# Altium PCB BMS_LOST_V1.PcbDoc
Units mil, origin at the board's own origin, x right, y up, seen from the top; angles counter-clockwise.
Board outline 1732.28 x 1703.8 mil, 2 copper layers (Top Layer, Bottom Layer); 24 components, 32 nets, 128 pads, 24 vias.
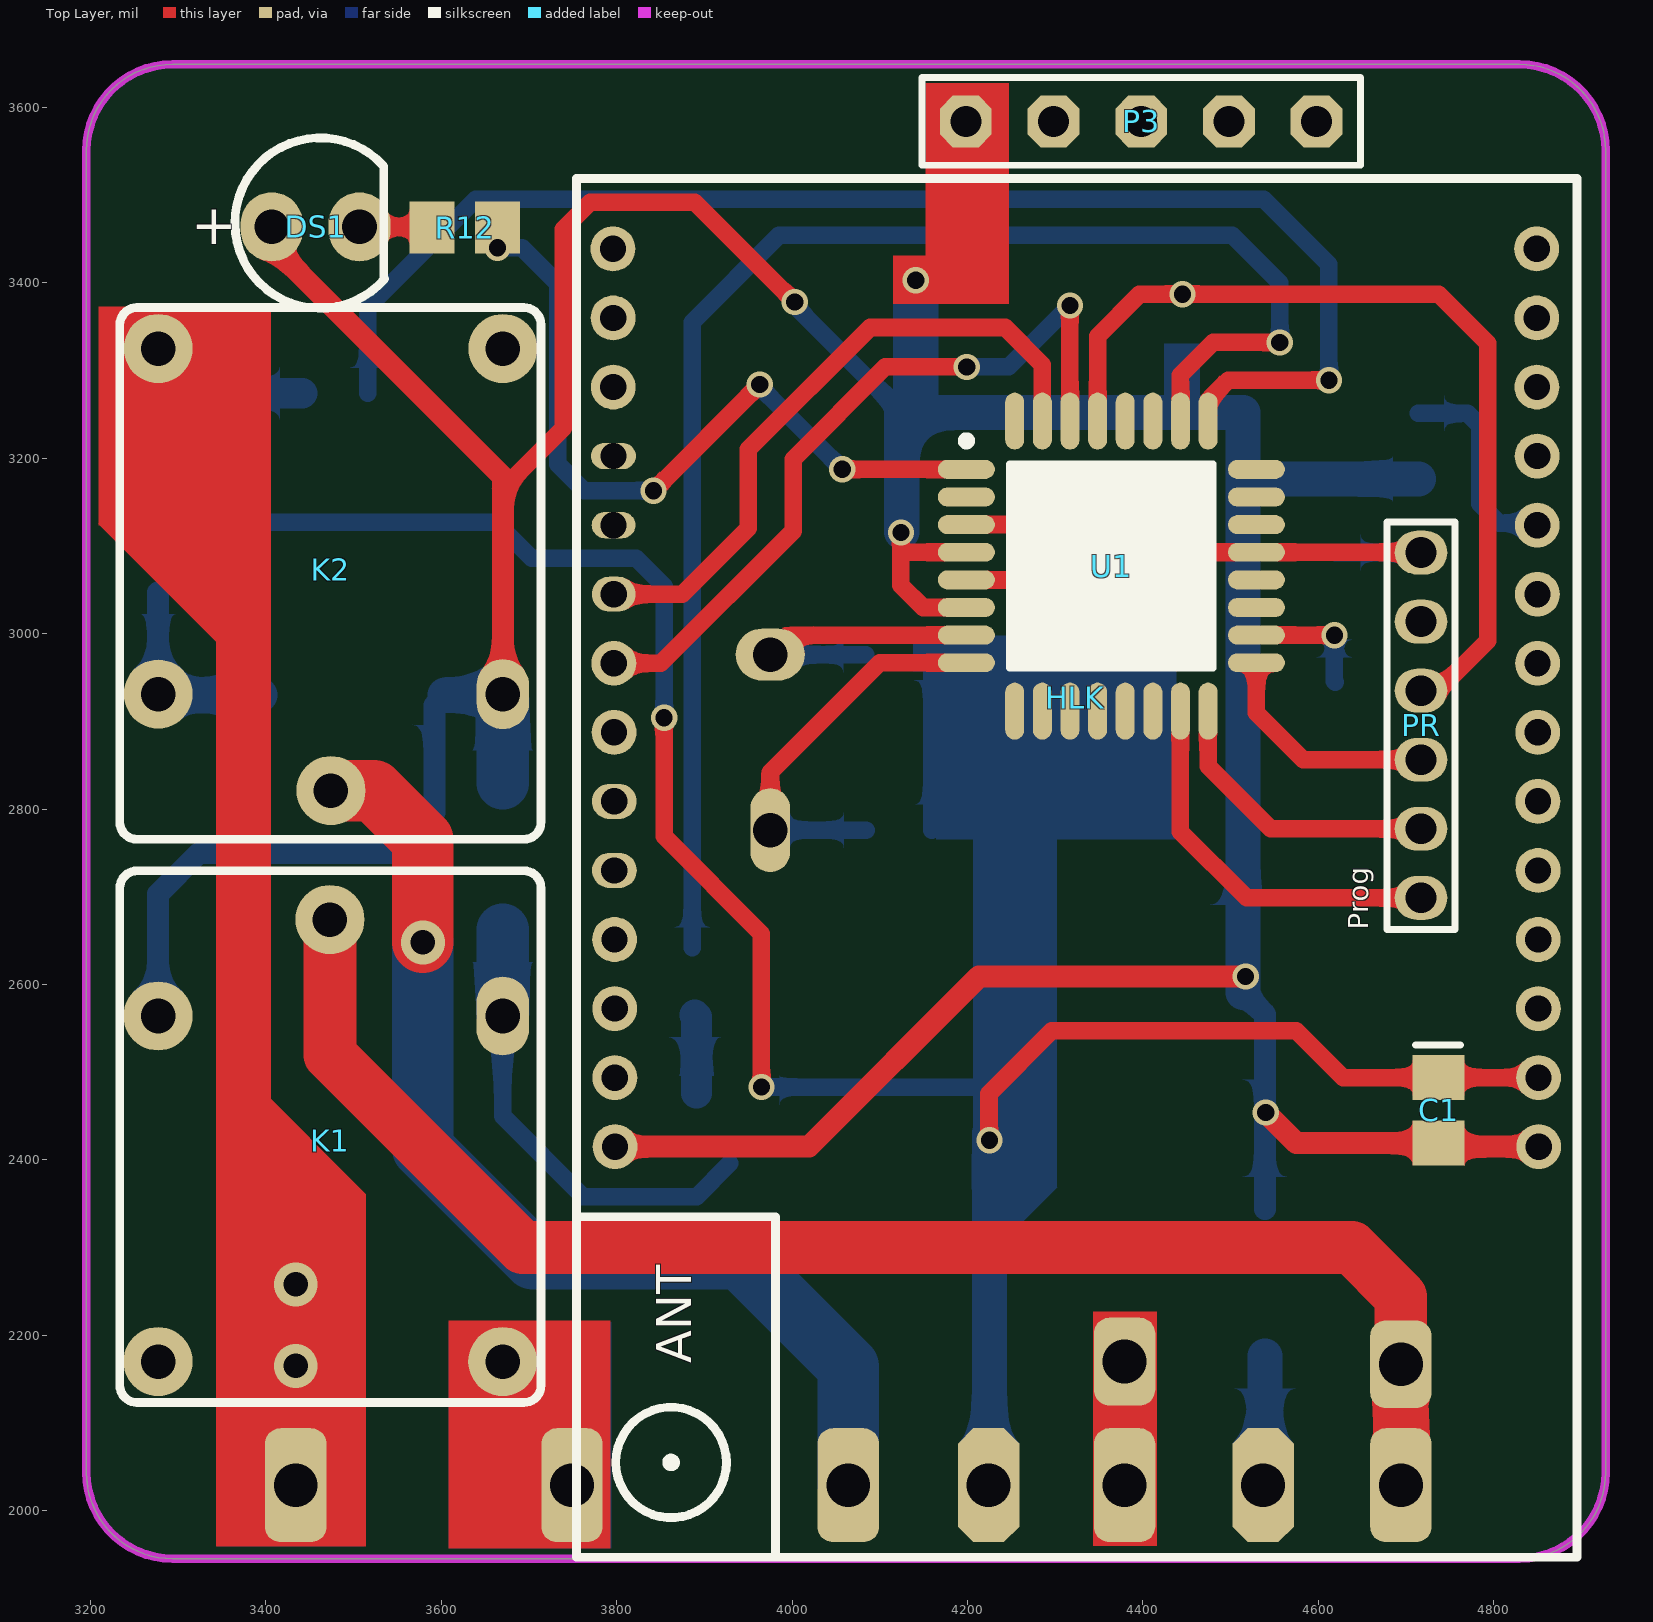
[diagram p0: Top Layer view]
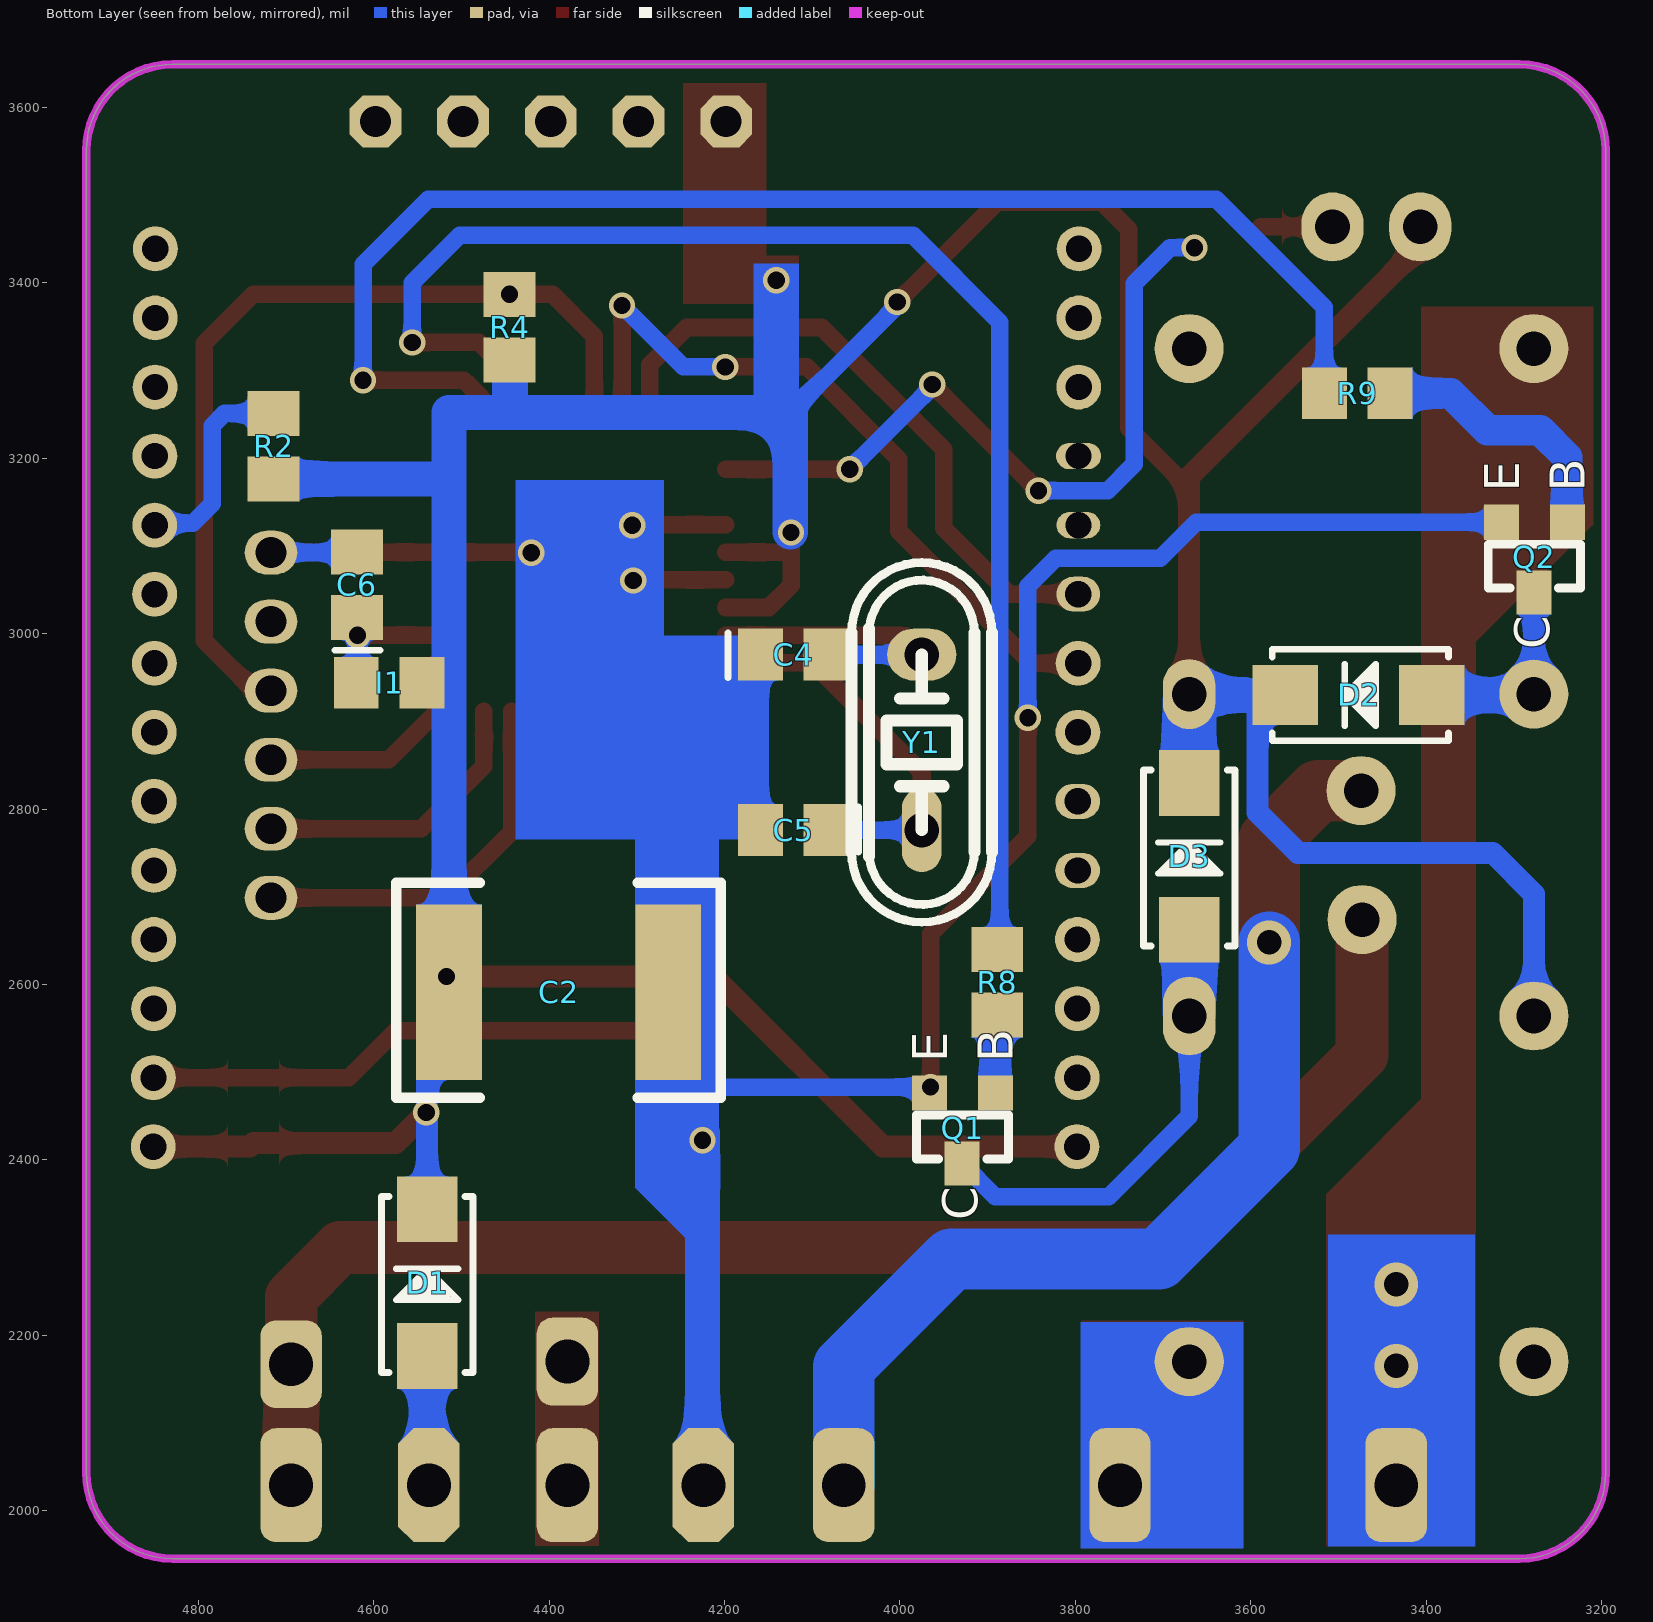
[diagram p1: Bottom Layer view, seen from below]
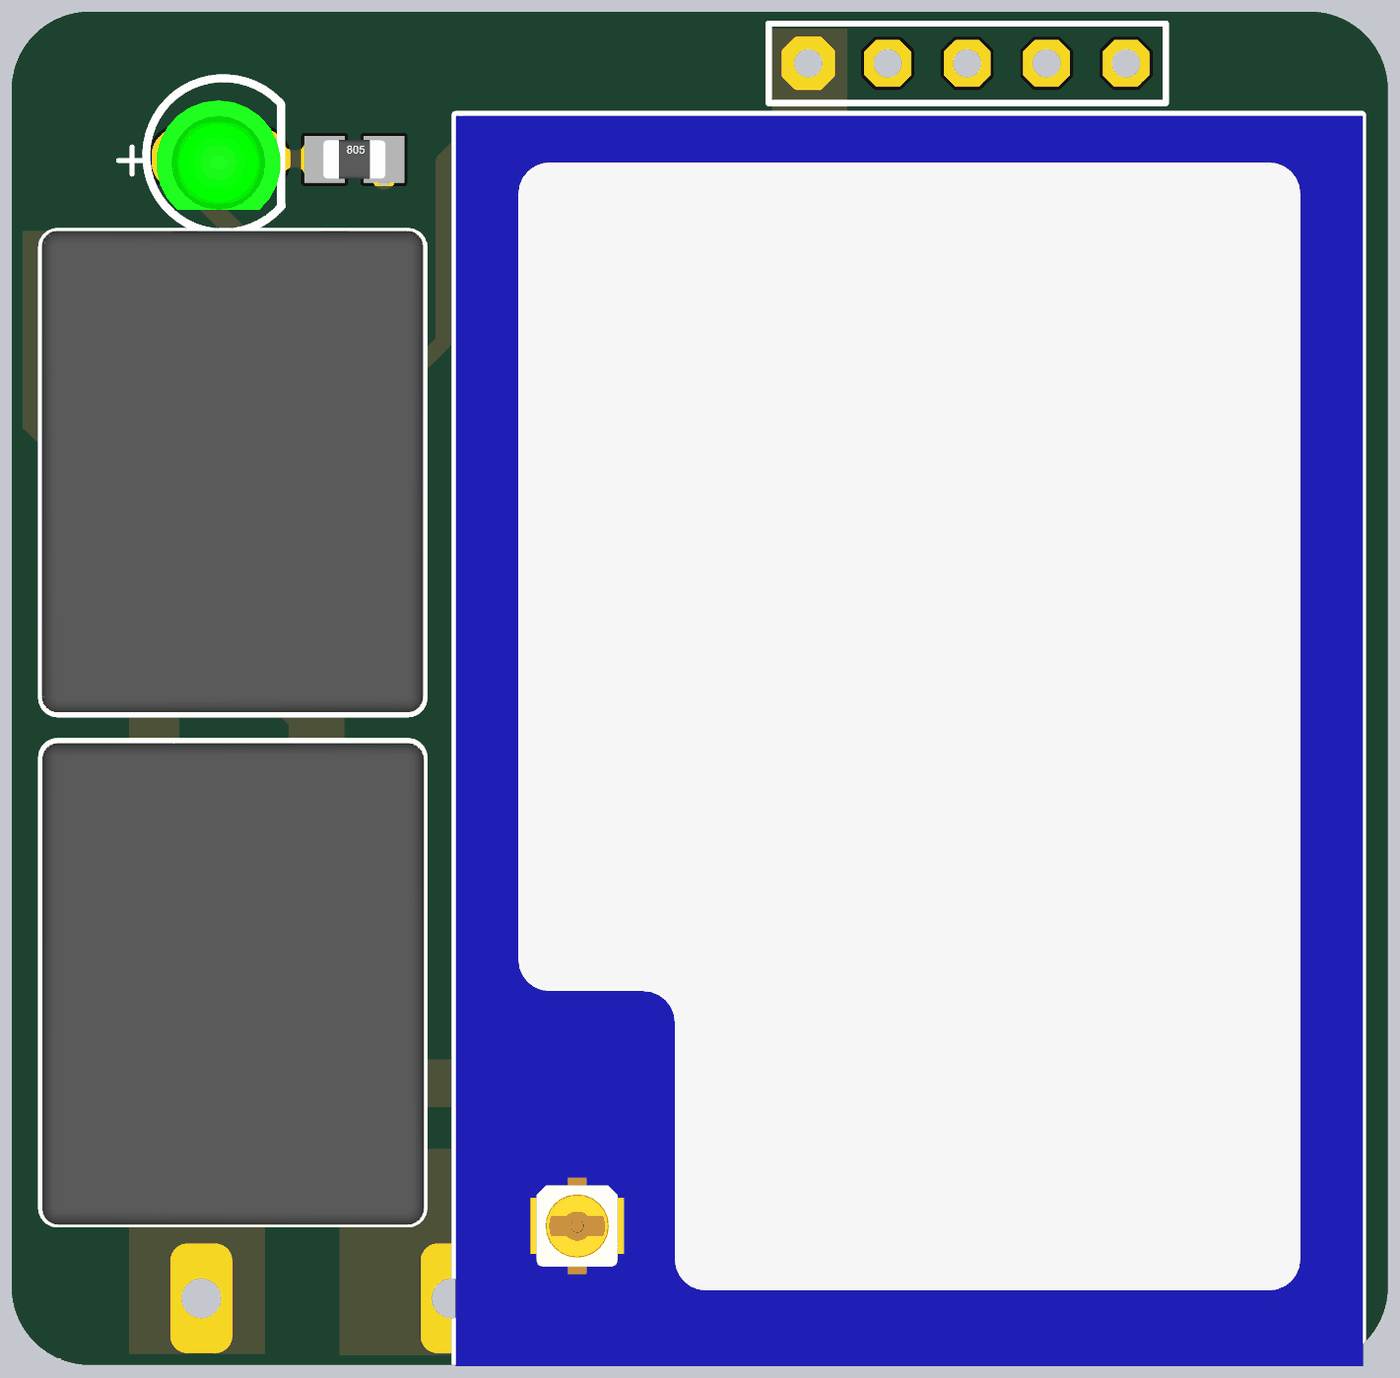
[diagram p2: 3D render of the assembled board from above, using the file's embedded part models]
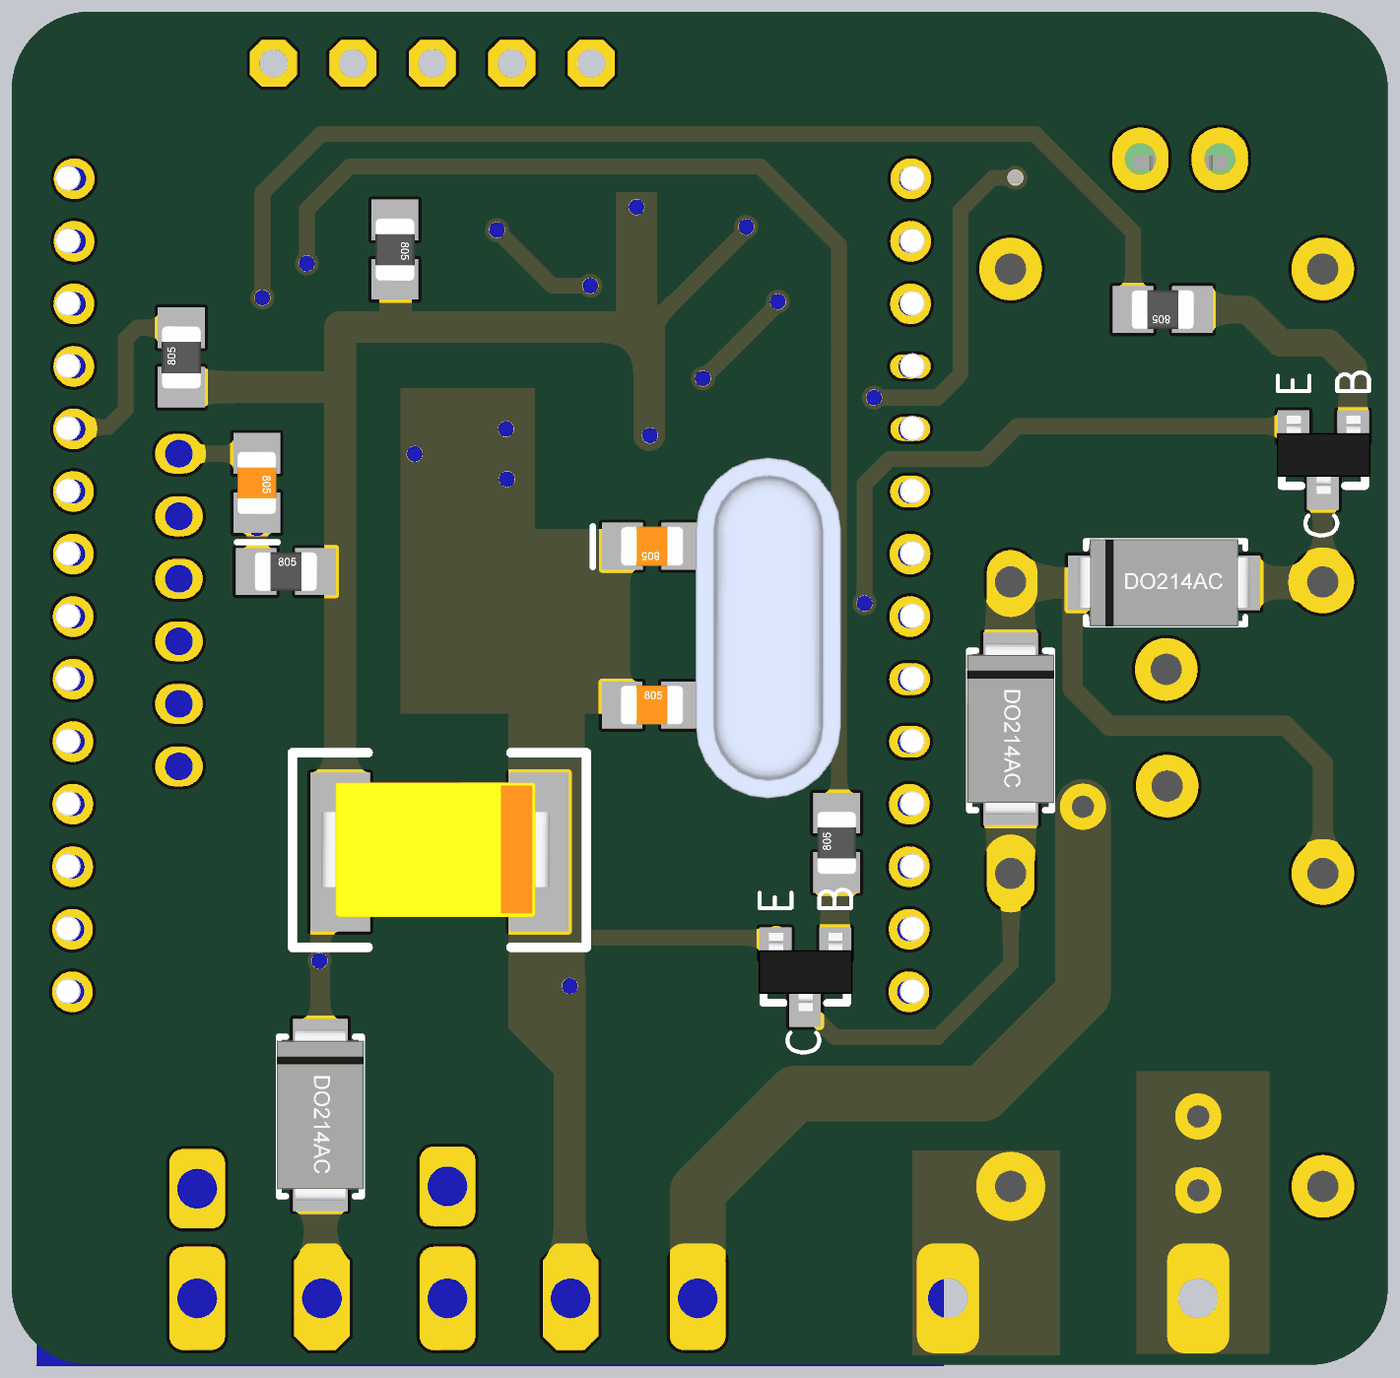
[diagram p3: 3D render of the assembled board from below, using the file's embedded part models]

## Layer stack, top to bottom
Top Solder: solder mask 0.4, Solder Resist, Dk 3.5
Top Layer: signal copper 1.4
Dielectric 1: dielectric 12.6, FR-4, Dk 4.8
Bottom Layer: signal copper 1.4
Bottom Solder: solder mask 0.4, Solder Resist, Dk 3.5

## Board outline
3195.25,2043.68 3195.25,3550.63 cw(c3293.68,3550.63) 3293.68,3649.05 4829.11,3649.05 cw(c4829.11,3550.63) 4927.53,3550.63 4927.53,2043.68 cw(c4829.11,2043.68) 4829.11,1945.25 3293.68,1945.25 cw(c3293.68,2043.68)

## Design rules (kind name [scope] priority, off if disabled: settings)
Clearance [All] p1: gap=10
PolygonConnect [All] p1: connectstyle=Relief reliefconductorwidth=10 reliefentries=4 polygonreliefangle="90 Angle" airgapwidth=10
RoutingVias [All] p1: holewidth=28 width=50 viastyle="Through Hole" minholewidth=28 minwidth=50 maxholewidth=28 maxwidth=50
SolderMaskExpansion [All] p1: expansion=4
Width [All] p1: maxlimit=100 minlimit=10 preferedwidth=10
30 further rules are at their usual default settings.

## Components (designator, comment, footprint, x,y, rotation, side; value= is the part's Value field where it differs from the comment)
C1 "100nf" Cap0805 4737,2419 r90 top
C2 "Cap_4mm" 2220 4268,2589 r0 bottom
C4 "CAP 805" Cap0805 4084,2976 r0 bottom
C5 "CAP 805" Cap0805 4159,2776 r180 bottom
C6 "Cap0805" Cap0805 4619,3093 r270 bottom
D1 "SS34" Diod-1A-SMD 4538,2174 r90 bottom
D2 "SS34" Diod-1A-SMD 3391,2931 r0 bottom
D3 "SS34" Diod-1A-SMD 3669,2660 r90 bottom
DS1 "LED1" LED3MM 3512,3466 r180 top
HLK "HLK_WifiModule" HLK 4850,3440 r180 top
I1 "Indicator100uH" Indicator0805 4618,2942 r180 bottom
K1 "Relay" RelayMilionMiniS-Z#1 3670,2170 r90 top
K2 "Relay" RelayMilionMiniS-Z#2 3277.18,3325 r270 top
P3 "Header 5" HDR1X5 4198,3584 r0 top (schematic designator P2)
PR "Programmer" Programmer 4716,2701.43 r90 top
Q1 "BC817" SOT23 3889,2477 r0 bottom
Q2 "BC817" SOT23 3237,3128 r0 bottom
R2 "Res 0805" R0805 4714,3178 r90 bottom
R4 "Res 0805" R0805 4445,3385 r270 bottom
R8 "Res 0805" R0805 3889,2567 r90 bottom
R9 "Res 0805" R0805 3443,3274 r0 bottom
R12 "330" R0805 3591,3463 r0 top
U1 "ATmega8-16AU" 32A_N 4364,3077 r0 top
Y1 "Xtal" CrystallB 3976,2977 r270 bottom

## Footprints (in the part's own frame and the unit in brackets; to place one, negate y for a bottom-side part, rotate by r counter-clockwise, add the part's x,y. Pads: shape width x height; smd on the part's side, far side on the other; paste and mask are expansions set on the pad)
32A_N [mm] "Thin QFP, 32-Leads, Body 7x7mm, Pitch 0.8mm, IPC Medium Density"
  oval 1.65x0.55 smd: 1(-4.2,2.8) 2(-4.2,2) 3(-4.2,1.2) 4(-4.2,0.4) 5(-4.2,-0.4) 6(-4.2,-1.2) 7(-4.2,-2) 8(-4.2,-2.8) 17(4.2,-2.8) 18(4.2,-2) 19(4.2,-1.2) 20(4.2,-0.4) 21(4.2,0.4) 22(4.2,1.2) 23(4.2,2) 24(4.2,2.8)
  oval 0.55x1.65 smd: 9(-2.8,-4.2) 10(-2,-4.2) 11(-1.2,-4.2) 12(-0.4,-4.2) 13(0.4,-4.2) 14(1.2,-4.2) 15(2,-4.2) 16(2.8,-4.2) 25(2.8,4.2) 26(2,4.2) 27(1.2,4.2) 28(0.4,4.2) 29(-0.4,4.2) 30(-1.2,4.2) 31(-2,4.2) 32(-2.8,4.2)
  silkscreen extent -4.32,-2.95 2.95,3.75, body extent -3.5,-3.5 3.5,3.5, height 1.2
2220 [mil]
  rect 75x200 smd: 1(-4,-2) 2(246,-2)
  silkscreen extent -64,-127 306,118, body extent -18,-90 270,80, height 122
Cap0805 [mm]
  rect 1.3x1.5 smd: 1(0,0) 2(1.9,0)
  silkscreen extent 2.84,-0.63 2.84,0.67, body extent -0.05,-0.62 1.95,0.63, height 0.78
CrystallB [mil]
  oval 95.55x45 hole 39.37: 1(201,1)
  oval 59.06x78.74 hole 39.37: 2(1,1)
  silkscreen extent -104,-79 306,81, body extent -111,-91 319,93, height 138
Diod-1A-SMD [mm]
  rect 1.9x1.75 smd: A(0.059,0.025) K(4.309,0.025)
  silkscreen extent -0.42,-1.3 4.68,1.35, body extent -0.56,-1.37 4.93,1.42, height 2.24
HDR1X5 [mm] "Connector; Header; 5 Position"
  oct 1.5x1.5 hole 0.9: 1(7.62,0) 2(10.16,0) 3(5.08,0) GND(2.54,0) VCC(0,0)
  silkscreen extent -1.27,-1.27 11.43,1.27
HLK [mm]
  round 1.3 hole 0.762: 1(-0.03,26.035) 2(-0.025,24.035) 3(-0.021,22.035) 4(-0.016,20.035) 5(-0.012,18.035) 6(-0.007,16.035) 7(-0.002,14.035) 8(0.002,12.035) 9(0.007,10.035) 10(0.011,8.035) 11(0.016,6.035) 12(0.021,4.035) 13(0.025,2.035) 14(0.03,0.035) 15(26.78,0.035) 16(26.775,2.035) 17(26.771,4.035) 21(26.752,12.035) 22(26.748,14.035) 25(26.734,20.035) 26(26.729,22.035) 27(26.725,24.035) 28(26.72,26.035)
  oval 1.3x0.762 hole 0.762: 18(26.766,6.035)
  oval 1.27x0.762 hole 0.762: 19(26.761,8.035)
  oval 1.27x1.016 hole 0.762: 20(26.757,10.035)
  oval 1.3x1.016 hole 0.762: 23(26.743,16.035) 24(26.738,18.035)
  silkscreen extent -1.14,-2.01 27.84,37.92, body extent -1.17,-1.99 27.83,38.01, height 5.25
Indicator0805 [mm]
  rect 1.3x1.5 smd: 1(-0.046,0.051) 2(1.854,0.051)
  body extent -0.1,-0.57 1.9,0.68, height 0.78
LED3MM [mm]
  oval 1.8x2 hole 1: A(2.675,0.059) K(0.135,0.059)
  silkscreen extent -0.6,-2.52 3.74,2.42, body extent -0.56,-1.81 3.43,1.68, height 7.88
Programmer [mil]
  oval 50x60 hole 35: 1(-2.7,-1) 2(76.04,-1) 3(154.78,-1) 4(233.52,-1) 5(312.26,-1) 6(391,-1)
  silkscreen extent -39,-40 426,38
R0805 [mm]
  rect 1.3x1.5 smd: 1(-0.046,0) 2(1.854,0)
  body extent -0.1,-0.62 1.9,0.63, height 0.78
RelayMilionMiniS-Z#1 [mm]
  round 2 hole 1: 1(10.008,9.982) 2(0,9.982) 3(0,0) 5(12.802,5.004)
  oval 2.286x1.524 hole 1: 4(10.008,0)
  silkscreen extent -1.19,-1.11 14.21,11.09, body extent -1.22,-1.12 14.18,11.08, height 13
RelayMilionMiniS-Z#2 [mm]
  oval 2.032x1.524 hole 1: 1(10.008,9.982)
  round 2 hole 1: 2(0,9.982) 3(0,0) 4(10.008,0) 5(12.802,5.004)
  silkscreen extent -1.19,-1.11 14.21,11.09, body extent -1.22,-1.12 14.18,11.08, height 13
SOT23 [mil]
  rect 40x40 smd: 1(2,1) 2(77,1)
  rect 40x50 smd: 3(40,81)
  silkscreen extent -13,26 92,76, body extent -20,-12 98,86, height 41

## Part data
C1 C4 C5: library part Cap0805, "surface mount capacitor (size 805)"
C2: library part Cap_Pola
C6: "surface mount capacitor (size 805)"
D1 D2 D3: library part Diode
K1 K2: library part RelayMilon
P3: "Header, 5-Pin"
Q1 Q2: library part "Transistor NPN"
R12: library part "Res 0805"
U1: "8-bit AVR Microcontroller, 4.5-5.5V, 16MHz, 8KB Flash, 512 Bytes EEPROM, 1KB SRAM, 32-pin TQFP, Industrial Grade (-40°C to 85°C)"
Y1: library part Crystal

## Free pads (board coordinates)
  rrect50% 70x130 hole 50: 0(3434,2029) 0(3749,2029) 0(4064,2029) 0(4379,2029) 0(4694,2029)
  oct 70x130 hole 50: 0(4224,2029) 0(4537,2029)
  rrect50% 70x100 hole 50: 0(4379,2170) 0(4694,2167)

## Via types
v1: diameter 30, hole 19.68, Top Layer to Bottom Layer, tented both sides, 21 vias
v2: diameter 50, hole 28, Top Layer to Bottom Layer, 3 vias

## Nets (pads, with @x,y where several pads share a name; then routed paths per layer and width w, separated by ;. In a path a pad name is that pad's centre, name@x,y a point inside that pad or via, vN(x,y) a via of type N, cw(c..) or ccw(c..) an arc to the next point about the centre after c; other vN are vias at no path point)
AVCC: C6.2 I1.1 U1.18 | length 142.7
  Top Layer w20: U1.18 v1(4618.26,2998.26)
  Bottom Layer w20: v1(4618.26,2998.26) 4618.26,2945.54 I1.1@4619,2944.8
B_RST: 
B_RX: 
B_TX: 
GND: C1.2 C2.1 C4.2 C5.1 C6.1 HLK.2 pad.0@4224,2029 PR.6 Q1.2 Q2.2 U1.3 U1.5 U1.21 | length 3544.3
  Top Layer w20: v1(3854,2904) 3854,2769 3965,2658 v1(3965,2483) ; U1.5 v1@4304,3061.25 ; U1.3 v1@4305.24,3124.24 ; v1@4224.45,2422.34 4224.45,2475.45 4296,2547 4575,2547 4628.2,2493.8 C1.2 4850.94,2493.8 HLK.2 ; v1@4421.25,3092.75 U1.21 4716.68,3092.75 PR.6
  Top Layer w25: pad.0@4224,2029 pad.0@4224.45,2029.45
  Bottom Layer w20: Q2.2 3662,3127 3703,3086 3822,3086 3854,3054 v1(3854,2904) ; v1(3965,2483) 4242.2,2483 4243.2,2484 ; C4.2 4159,2975.8 C5.1 ; pad.0@4224,2029 pad.0@4225,2030 ; C6.1@4619.57,3092.43 PR.6
  Bottom Layer w25: v1@4225,2430.8 4230.2,2436 4243.2,2449 4243.2,2484 C2.1@4243.2,2562.2
  Bottom Layer w40: pad.0@4225,2030 v1(4225,2422.34) v1@4225,2430.8
  other v1: 4304,3060.59 4420.25,3092.09 4305.24,3123.58
LED_BL: 
MISO: PR.2 U1.16 | length 335.2
  Top Layer w20: U1.16 4474.24,2848.76 4545.53,2777.47 PR.2
MOSI: PR.1 U1.15 | length 442.9
  Top Layer w20: U1.15 4442.74,2774.26 4518.27,2698.73 PR.1
NetD2_A: D2.A K2.4 Q2.3 | length 232.6
  Bottom Layer w25: Q2.3 3277,2931.18 K2.4
  Bottom Layer w40: K2.4@3278.18,2930 D2.A
  Bottom Layer w60: K2.4 K2.4@3278.18,2930
NetD3_A: D3.A K1.4 Q1.3 | length 525.2
  Bottom Layer w20: K1.4 3670,2450 3762,2358 3891,2358 Q1.3
  Bottom Layer w60: K1.4 D3.A
NetDS1_K: DS1.K R12.1 | length 82.8
  Top Layer w20: DS1.K 3588.5,3463.69 R12.1
NetHC_34: 
NetQ1_1: Q1.1 R8.1 | length 90
  Bottom Layer w35: R8.1 3891,2563.2 Q1.1
NetQ2_1: Q2.1 R9.1 | length 306.4
  Bottom Layer w35: Q2.1 3239,3201 3270,3232 3330,3232 3372,3274 R9.1
PHASE1: K1.3 pad.0@3749,2029 | length 173.7
  Bottom Layer w80: K1.3 3670,2108 pad.0@3749,2029
PHASE2: K2.3 pad.0@3434,2029
  other v2: 3434,2165 3434,2258
PHASEN1: K1.5 pad.0@4694,2029 pad.0@4694,2167 | length 1704.3
  Top Layer w60: K1.5 3473,2520 3693,2300 4638,2300 4694,2244 4694,2167 pad.0@4694,2029
PHASEN2: K2.5 pad.0@4064,2029 | length 1203.2
  Top Layer w70: K2.5 3523,2821 3579,2765 v2(3579,2648)
  Bottom Layer w70: v2(3579,2648) 3579,2413 3705,2287 3941,2287 4064,2164 pad.0@4064,2029
RE1: R8.2 U1.26 | length 1695.5
  Top Layer w20: U1.26 4442.74,3294.74 4480,3332 v1(4556,3332)
  Bottom Layer w20: R8.2@3886,2642 3886,3355 3985,3454 4502,3454 4556,3400 v1(4556,3332)
RE2: R9.2 U1.25 | length 1578.6
  Top Layer w20: U1.25 4474.24,3266.08 4497.16,3289 v1(4612,3289)
  Bottom Layer w20: R9.2 3516,3372 3639.05,3495.05 4537.95,3495.05 4612,3421 v1(4612,3289)
RFU: R12.2 U1.1 | length 861.7
  Top Layer w20: v1(3842,3163) v1(3963,3284) ; v1(4057.24,3187.24) U1.1
  Bottom Layer w20: v1(3664,3440) 3692,3440 3733,3399 3733,3193 3763,3163 v1(3842,3163) ; v1(3963,3284) 3963,3281.47 v1(4057.24,3187.24)
RST: PR.4 R4.1 U1.29 | length 1023.3
  Top Layer w20: U1.29 4348.25,3339.25 4396,3387 4737,3387 4793,3331 4793,2992 4735.95,2934.95 PR.4
  other v1: 4445,3386.8
SCK: PR.3 U1.17 | length 266.9
  Top Layer w20: U1.17 4529.35,2909.65 4582.79,2856.21 PR.3
VCC: C1.1 C2.2 D1.K D2.K D3.K DS1.A HLK.1 HLK.28 I1.2 K1.1 K2.1 R2.1 R4.2 U1.4 U1.6 | length 5251.7
  Top Layer w20: 3670.18,3165.18 3739,3234 3739,3461 3770,3492 3889,3492 v1(4003,3378) ; v1(4124,3115.34) 4124,3055 4149.24,3029.76 U1.6 ; 4124.75,3092.75 U1.4
  Top Layer w25: DS1.A 3406.69,3442.31 3670.18,3178.82 3670.18,3165.18 K2.1 ; HLK.28 4019,2415 4213,2609 v1(4517,2609) ; v1(4540,2454) 4575,2419 C1.1 4741,2415 HLK.1
  Bottom Layer w20: v1(4003,3378) 4003,3374 4125,3252
  Bottom Layer w25: K1.1 3277,2703 3324,2750 3546,2750 3592,2796 3592,2918 3604,2930 ; K2.1@3669.18,2930 3670,2930.82 K2.1 ; C2.2 4539,2566 D1.K
  Bottom Layer w40: 3604,2930 K2.1@3669.18,2930 ; v1@4125,3116 4125,3252 4514,3252 C2.2 ; 4518,3176.2 R2.1
  Bottom Layer w60: D3.K K2.1@3670,2930.82
  other v1: 4141,3403
VCC3.3: 
VCC+3.3V: 
VDD: D1.A pad.0@4537,2029 | length 148.2
  Bottom Layer w25: pad.0@4537,2029 pad.0@4539,2031
  Bottom Layer w40: pad.0@4539,2031 D1.A
W_RST: HLK.10 R2.2 | length 240.4
  Bottom Layer w20: R2.2 4770,3251 4784,3237 4784,3148 4806,3126 4847.21,3126 HLK.10
W_RX: HLK.20 U1.31 | length 749.2
  Top Layer w20: HLK.20 3874.92,3044.92 3950,3120 3950,3210 4089,3349 4243,3349 4285.26,3306.74 U1.31
W_TX: HLK.21 U1.30 | length 869.8
  Top Layer w20: HLK.21 3850.18,2966.18 4001,3117 4001,3199 4106,3304 v1(4199,3304) ; U1.30 v1(4316.76,3374) v1@4316.76,3375.24
  Bottom Layer w20: v1(4199,3304) 4246.76,3304 v1(4316.76,3374)
XT1: C4.1 U1.7 Y1.2 | length 344.8
  Top Layer w20: Y1.2 3977,2974 4001.26,2998.26 U1.7
  Bottom Layer w20: Y1.2 Y1.2@3978,2979 ; Y1.2@3978,2976 C4.1
XT2: C5.2 U1.8 Y1.1 | length 450.5
  Top Layer w20: Y1.1 3975,2842 4099.76,2966.76 U1.8
  Bottom Layer w20: Y1.1 C5.2
pads on no net: HLK.3 HLK.4 HLK.5 HLK.6 HLK.7 HLK.8 HLK.9 HLK.11 HLK.12 HLK.13 HLK.14 HLK.15 HLK.16 HLK.17 HLK.18 HLK.19 HLK.22 HLK.23 HLK.24 HLK.25 HLK.26 HLK.27 K1.2 K2.2 P3.1 P3.2 P3.3 P3.GND P3.VCC PR.5 U1.2 U1.9 U1.10 U1.11 U1.12 U1.13 U1.14 U1.19 U1.20 U1.22 U1.23 U1.24 U1.27 U1.28 U1.32

## Keep-outs
Keep-Out Layer:
  the board outline again, w10

## Other copper
Top Layer:
  rectangle net PHASE1: 3608,1957 3793,2217
  rectangle net PHASE2: 3343,1959 3406,3316
  rectangle net PHASE2: 3209,3123 3406,3373
  rectangle net PHASE2: 3348,1959 3514,2361
  rectangle: 4343,1960 4416,2227
  rectangle net VCC: 4152,3378 4247,3628
  rectangle net VCC: 4115,3376 4247,3431
  region net PHASE2: 3209,3125 3353,2981 3392,2981 3385,2988 3385,3166
  region net PHASE2: 3514,2361 3386,2489 3356,2489 3356,2287 3375,2268
Bottom Layer:
  rectangle net PHASE2: 3344,1959 3512,2315
  rectangle net PHASE1: 3608,1957 3794,2215
  rectangle net GND: 4206,2369 4302,2814
  rectangle net GND: 4269,2957 4438,3175
  rectangle net GND: 4138,2957 4424,2998
  rectangle net GND: 4234,2667 4295,2978
  rectangle net GND: 4164,2765 4438,2969
  rectangle net VCC: 4424,3259 4465,3331
  rectangle net VCC: 4115.01,3261.99 4167,3422
  region net GND: 4302,2369 4237,2304 4210,2304 4230.2,2324.2 4230.2,2436

## Silkscreen, mask and mechanical layers (free items; w line width, h text height)
Top Overlay:
  rectangle: 4247.86,2960.86 4480.14,3193.14

## Text inside footprints (layer, text, board x,y; h text height)
DS1: Top Overlay "+" at 3314.96,3444.01 h45.28
HLK: Top Overlay "ANT" at 3885,2168 h40 r90
PR: Top Overlay "Prog" at 4665,2662.43 h39.37 r90
Q1: Bottom Overlay "C" at 3911,2331 h40 r270; Bottom Overlay "E" at 3946,2511 h40 r270; Bottom Overlay "B" at 3871,2511 h40 r270
Q2: Bottom Overlay "C" at 3259,2982 h40 r270; Bottom Overlay "E" at 3294,3162 h40 r270; Bottom Overlay "B" at 3219,3162 h40 r270